# Altium PCB PCB1.PcbDoc
Units mil, origin at the board's own origin, x right, y up, seen from the top; angles counter-clockwise.
Board outline 6000 x 4000 mil, 2 copper layers (Top Layer, Bottom Layer); 13 components, 24 nets, 296 pads, 56 vias.
Unrouted connection lines stored in the file: 14.
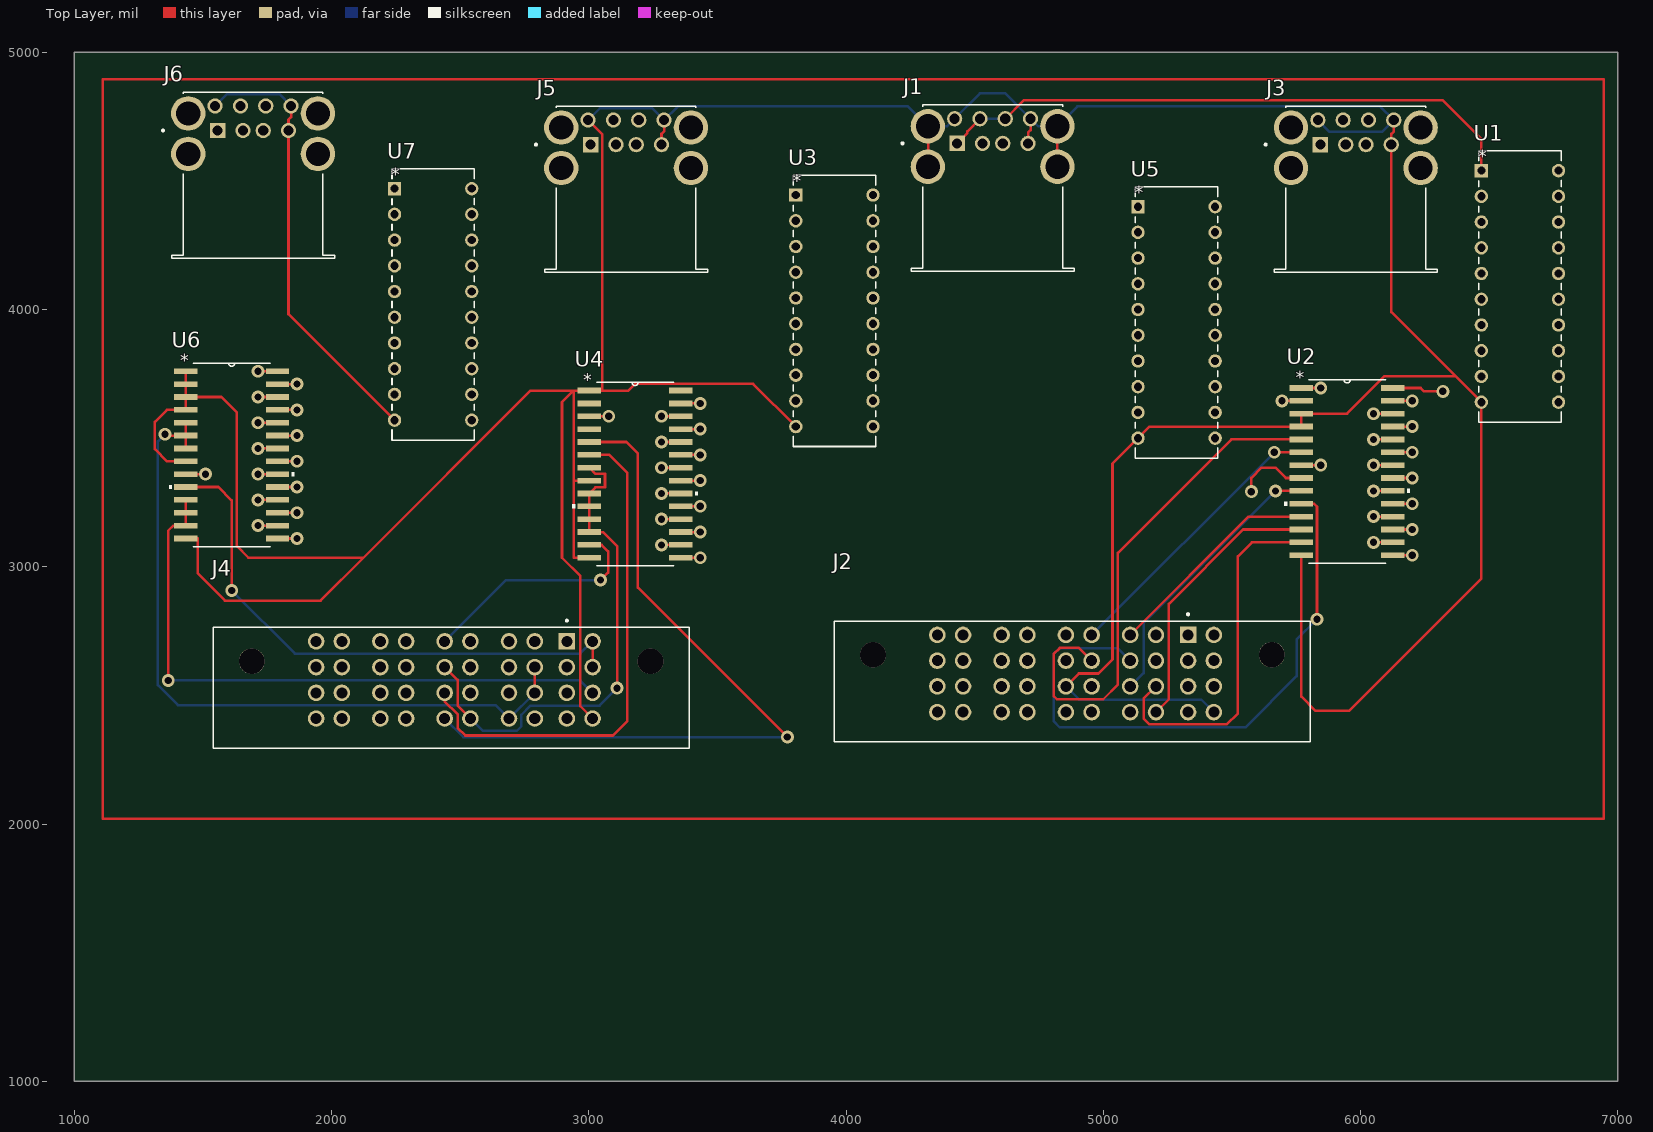
[diagram p0: Top Layer view]
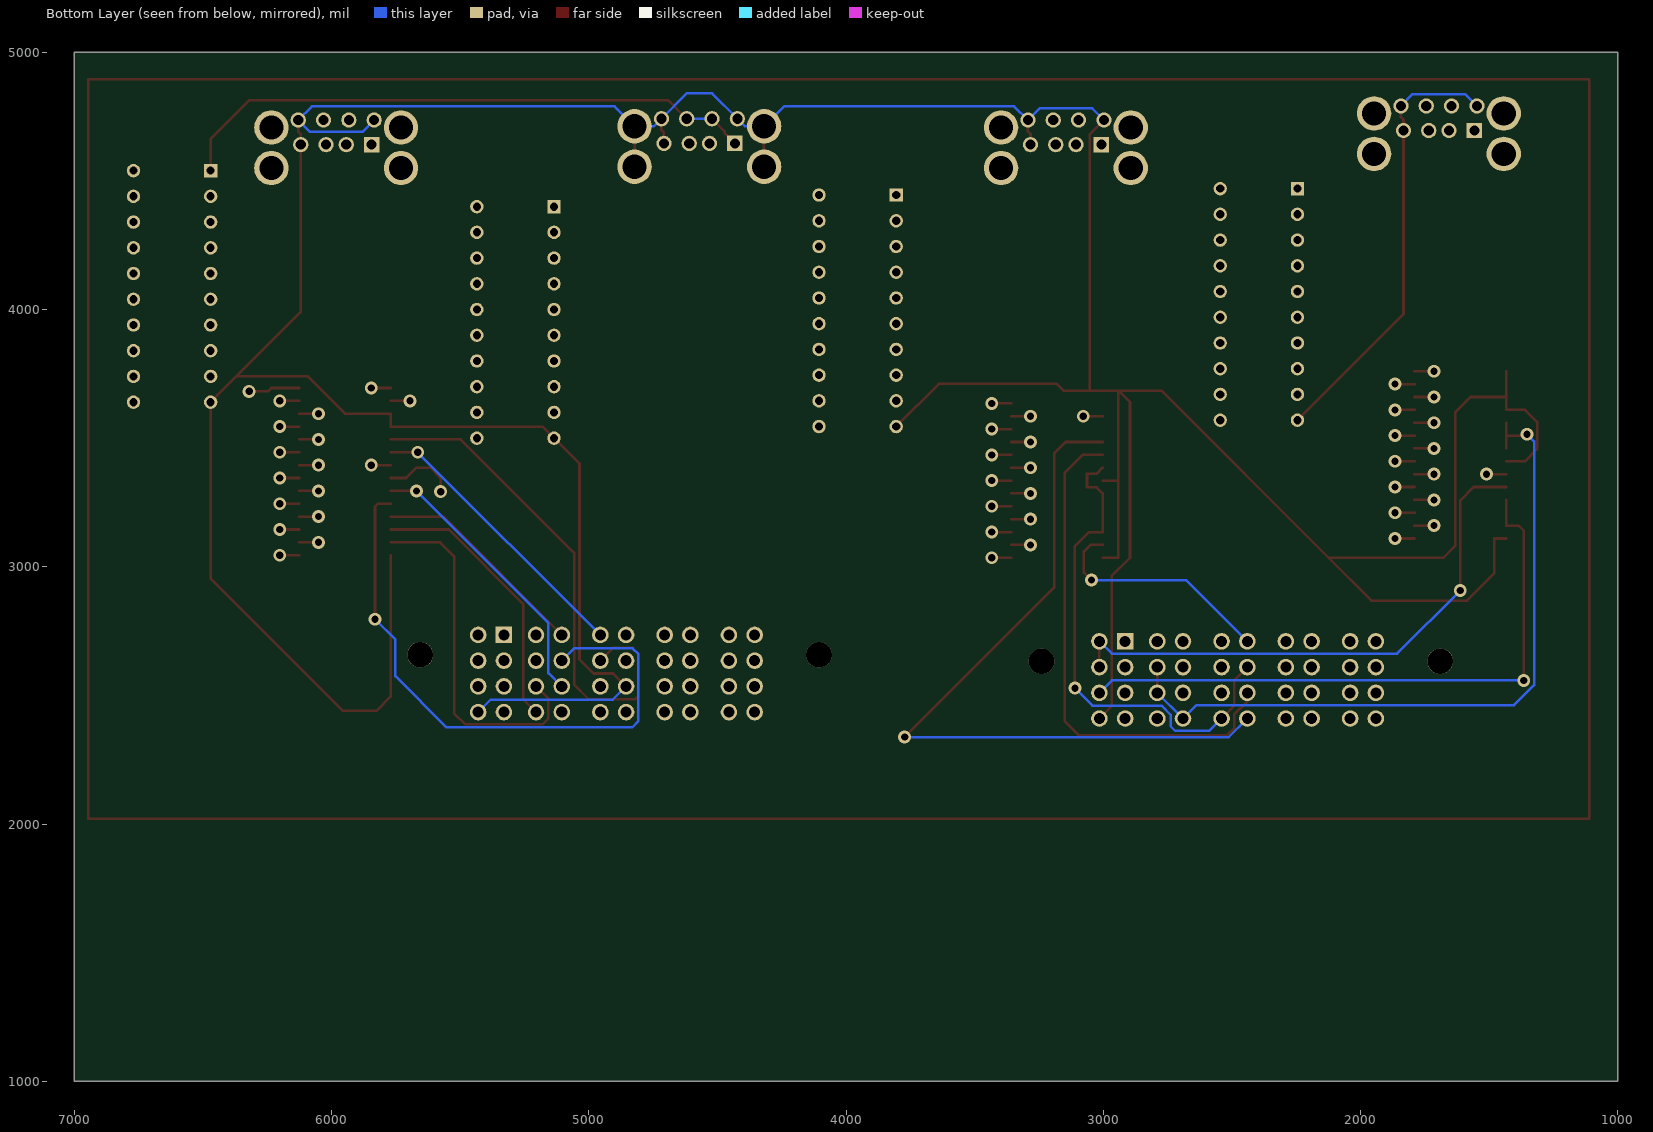
[diagram p1: Bottom Layer view, seen from below]
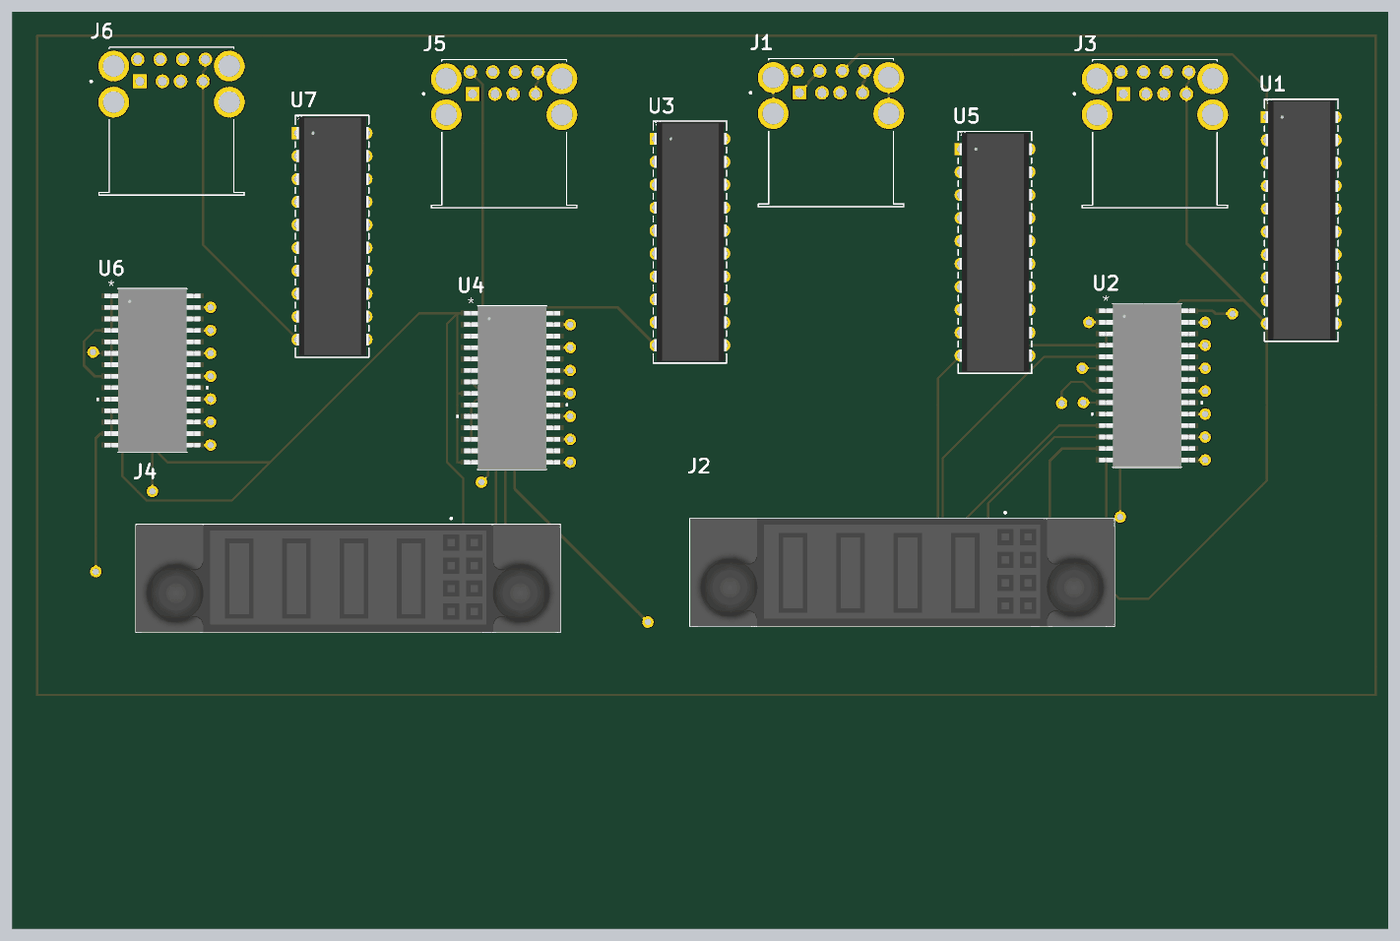
[diagram p2: 3D render of the assembled board from above, using the file's embedded part models]

## Layer stack, top to bottom
Top Solder: solder mask 0.4, Solder Resist, Dk 3.5
Top Layer: signal copper 1.4
Dielectric 1: dielectric 12.6, FR-4, Dk 4.8
Bottom Layer: signal copper 1.4
Bottom Solder: solder mask 0.4, Solder Resist, Dk 3.5

## Board outline
1000,1000 7000,1000 7000,5000 1000,5000

## Design rules (kind name [scope] priority, off if disabled: settings)
Clearance [All] p1: gap=10 ignorepadtopadclearanceinfootprint=FALSE except(0: Arc-Hole Track-Hole SMDPad-Hole THPad-Hole Via-Hole Fill-Hole Poly-Hole Region-Hole Text-Hole)
PolygonConnect [All] p1: connectstyle=Relief reliefconductorwidth=10 reliefentries=4 polygonreliefangle="90 Angle" airgapwidth=10
RoutingVias [All] p1: holewidth=28 width=50 viastyle="Through Hole" minholewidth=28 minwidth=50 maxholewidth=28 maxwidth=50
SolderMaskExpansion [All] p1: expansion=4 istentingtop=FALSE
Width [All] p1: maxlimit=10 minlimit=10 preferedwidth=10
30 further rules are at their usual default settings.

## Classes and differential pairs
component class Sheet1: J1 J2 J3 J4 J5 U1 U2 U3 U4 U5 U6 U7

## Components (designator, comment, footprint, x,y, rotation, side; value= is the part's Value field where it differs from the comment)
J1 "55917-001LF" AMPHENOL_55917-001LF 4570,4555 r0 top
J2 "51742-10400800AALF" AMPHENOL_51742-10400800AALF 4880,2657.83 r180 top
J3 "55917-001LF" AMPHENOL_55917-001LF 5981.97,4550 r0 top
J4 "51742-10400800AALF" AMPHENOL_51742-10400800AALF 2465,2632.83 r180 top
J5 "55917-001LF" AMPHENOL_55917-001LF 3145,4550 r0 top
J6 "55917-001LF" AMPHENOL_55917-001LF 1695,4605 r0 top
U1 "ADC0820CCN+" 21-0043D_20_MXM 6470,4540 r0 top
U2 "ADS7824U/1K" DW28 5948,3370 r0 top
U3 "ADC0820CCN+" 21-0043D_20_MXM 3805,4445 r0 top
U4 "ADS7824U/1K" DW28 3180,3360 r0 top
U5 "ADC0820CCN+" 21-0043D_20_MXM 5135,4400 r0 top
U6 "ADS7824U/1K" DW28 1612,3435 r0 top
U7 "ADC0820CCN+" 21-0043D_20_MXM 2245,4470 r0 top

## Footprints (in the part's own frame and the unit in brackets; to place one, negate y for a bottom-side part, rotate by r counter-clockwise, add the part's x,y. Pads: shape width x height; smd on the part's side, far side on the other; paste and mask are expansions set on the pad)
21-0043D_20_MXM [mil]
  rect 52x52 / inner round 60 / far side rect 52x52 hole 32 paste-26 mask+0: 1(0,0)
  round 52 / inner round 60 / far side round 52 hole 32 paste-26 mask+0: 2(0,-100) 3(0,-200) 4(0,-300) 5(0,-400) 6(0,-500) 7(0,-600) 8(0,-700) 9(0,-800) 10(0,-900) 11(300,-900) 12(300,-800) 13(300,-700) 14(300,-600) 15(300,-500) 16(300,-400) 17(300,-300) 18(300,-200) 19(300,-100) 20(300,0)
  silkscreen extent -10,-978 310,78, body extent -5,-973 310,73, height 185
AMPHENOL_51742-10400800AALF [mm]
  rect 1.635x1.635 / inner round 1.635 / far side rect 1.635x1.635 hole 1.09: A1(-11.425,-1.96)
  round 1.635 hole 1.09: A2(-13.965,-1.96) B1(-11.425,0.58) B2(-13.965,0.58) C1(-11.425,3.12) C2(-13.965,3.12) D1(-11.425,5.66) D2(-13.965,5.66) P1_1(13.335,5.66) P1_2(13.335,3.12) P1_3(13.335,0.58) P1_4(13.335,-1.96) P1_5(10.795,5.66) P1_6(10.795,3.12) P1_7(10.795,0.58) P1_8(10.795,-1.96) P2_1(6.985,5.66) P2_2(6.985,3.12) P2_3(6.985,0.58) P2_4(6.985,-1.96) P2_5(4.445,5.66) P2_6(4.445,3.12) P2_7(4.445,0.58) P2_8(4.445,-1.96) P3_1(0.635,5.66) P3_2(0.635,3.12) P3_3(0.635,0.58) P3_4(0.635,-1.96) P3_5(-1.905,5.66) P3_6(-1.905,3.12) P3_7(-1.905,0.58) P3_8(-1.905,-1.96) P4_1(-5.715,5.66) P4_2(-5.715,3.12) P4_3(-5.715,0.58) P4_4(-5.715,-1.96) P4_5(-8.255,5.66) P4_6(-8.255,3.12) P4_7(-8.255,0.58) P4_8(-8.255,-1.96)
  round 2.54 hole 2.54 unplated: ""(-19.685,0) ""(19.685,0)
  silkscreen extent -23.49,-4.1 23.49,8.61, body extent -23.49,-3.3 23.49,8.64, height 17.02
AMPHENOL_55917-001LF [mm]
  rect 1.508x1.508 hole 1: 1(-3.5,2.31)
  round 1.508 hole 1: 2(-1,2.31) 3(1,2.31) 4(3.5,2.31) 5(-3.75,4.74) 6(-1.25,4.74) 7(1.25,4.74) 8(3.75,4.74)
  round 3.396 hole 2.38: SH1(-6.4,0) SH2(-6.4,4) SH3(6.4,0) SH4(6.4,4)
  silkscreen extent -9,-10.3 8.05,6.1
DW28 [mil]
  rect 91x22 smd paste-45.5 mask-45.5: 1(-178,325) 2(-178,275) 3(-178,225) 4(-178,175) 5(-178,125) 6(-178,75) 7(-178,25) 8(-178,-25) 9(-178,-75) 10(-178,-125) 11(-178,-175) 12(-178,-225) 13(-178,-275) 14(-178,-325) 15(178,-325) 16(178,-275) 17(178,-225) 18(178,-175) 19(178,-125) 20(178,-75) 21(178,-25) 22(178,25) 23(178,75) 24(178,125) 25(178,175) 26(178,225) 27(178,275) 28(178,325)
  silkscreen extent -244,-356 244,356, body extent -209,-356 209,356, height 104

## Part data
J1 J3 J5 J6: Package=None, Availability=Unavailable, MP=55917-001LF, Price=None
J2 J4: "PwrBladeÂ®, Power Supply Connectors, 4P 8S Vertical Receptacle.", Package=None, Availability="In Stock", Check_prices=https://www.snapeda.com/parts/51742-10400800AALF/Amphenol+FCI/view-part/?ref=eda, MF="Amphenol ICC (FCI)", MP=51742-10400800AALF, Price=None, Purchase-URL=https://pricing.snapeda.com/search?q=51742-10400800AALF&ref=eda, SnapEDA_Link=https://www.snapeda.com/parts/51742-10400800AALF/Amphenol+FCI/view-part/?ref=snap
U1 U3 U5 U7: "No Description Available", Mfr_Name="Analog Devices Inc", Copyright="Copyright (C) 2023 Ultra Librarian. All rights reserved.", Manufacturer_Part_Number=ADC0820CCN+, RefDes=RefDes, Type=DEV
U2 U4 U6: library part ADS7824U1K, "No Description Available", Mfr_Name="Texas Instruments", Copyright="Copyright (C) 2023 Ultra Librarian. All rights reserved.", Manufacturer_Part_Number=ADS7824U/1K, RefDes=RefDes, Type=DEV

## Via types
v1: diameter 50, hole 28, Top Layer to Bottom Layer, 56 vias

## Nets (pads, with @x,y where several pads share a name; then routed paths per layer and width w, separated by ;. In a path a pad name is that pad's centre, name@x,y a point inside that pad or via, vN(x,y) a via of type N, cw(c..) or ccw(c..) an arc to the next point about the centre after c; other vN are vias at no path point)
GND: J1.4 J1.5 J1.8 J1.SH1 J1.SH2 J1.SH3 J1.SH4 J2.D2 J2.P3_2 J3.4 J3.5 J3.8 J4.D2 J5.4 J5.5 J5.8 U1.10 U2.3 U2.4 U2.14 U3.10 U4.1 U4.8 U4.14 U5.10 U6.1 U6.2 U6.3 U6.4 U6.8 U6.14 | length 18702.3
  Top Layer w10: U6.14 1480,3110 1480,2974 1586,2868 1957,2868 2124,3035 ; U6.8 1360,3410 1313,3457 1313,3563 1360,3610 U6.4 U6.3 ; U6.1 U6.2 U6.3 ; J5.5 3052,4681.98 3052,3685 ; U4.14 2941,3035 2941,3335 ; U4.8 2941,3335 ; J4.D2 2967,2457.8 2967,2964 2896,3035 2896,3640 2941,3685 ; J5.4 3282.8,4683 3292.64,4692.84 J5.8 ; U3.10 3639,3711 3180,3711 3154,3685 3052,3685 ; J1.SH1 4319,4555.97 4319,4711.51 J1.SH2 ; J1.4 4707.8,4688 4717.64,4697.84 J1.8 ; J1.SH3 J1.SH4 ; J2.P3_2 4905,2585 4981,2585 5036,2640 5036,3401 U5.10 5180,3545 U2.4 U2.3 5948,3595 6094,3741 6369,3741 ; U2.14 5770,2495 5825,2440 5955,2440 6470,2955 U1.10 6369,3741 ; J3.8 6129.61,4692.84 6119.76,4683 J3.4 6119.76,3990.24 6369,3741 ; U6.3 1572,3660 1632,3600 1632,3080 1677,3035 2124,3035 ; 2124,3035 2774,3685 2941,3685 ; 2941,3335 2941,3685 ; 2941,3685 U4.1 3052,3685
  Bottom Layer w10: J5.5 3042.75,4782 3247.25,4782 J5.8 3346.02,4790 4240.51,4790 J1.SH2 4393.23,4712.48 J1.5 4520.75,4840 4619.25,4840 J1.8 4746.77,4712.48 J1.SH4 4899.49,4790 6076.22,4790 J3.8 6083.99,4691 5879.94,4691 J3.5 ; J2.P3_2 4907,2483 5381.8,2483 J2.D2
NetJ1_1: J1.1 J1.6 J1.7 U1.1 | length 2296.3
  Top Layer w10: J1.1 4472,4685.74 4472,4692.83 J1.6 ; J1.7 4690.6,4813 6320,4813 6470,4663 U1.1
  Bottom Layer w10: J1.6 J1.7
NetJ2_A2: J2.A2 U2.2 | length 75.5
  Top Layer w10: v1(5694.5,3645) U2.2
NetJ2_C2: J2.C2 U4.2 U4.3 U4.4 | length 75.5
  Top Layer w10: U4.3 v1(3077.5,3585)
NetJ2_P3_1: J2.P3_1 J2.P3_3 U2.1 | length 75.5
  Top Layer w10: U2.1 v1(5845.5,3695)
NetJ2_P3_7: J2.P3_7 U2.5 | length 2027.7
  Top Layer w10: J2.P3_7 4905,2685 4832,2685 4807,2660 4807,2498 4820,2485 5000,2485 5057,2542 5057,3054 5498,3495 U2.5
NetJ2_P3_8: J2.P3_8 U2.6 | length 1109.1
  Top Layer w10: v1(5665,3445) U2.6
  Bottom Layer w10: J2.P3_8 v1(5665,3445)
NetJ2_P4_1: J2.P4_1 U2.8 | length 280.4
  Top Layer w10: v1(5575.79,3292) 5575.79,3345 5615.79,3385 5670.36,3385 5710.36,3345 U2.8
NetJ2_P4_2: J2.P4_2 U2.9 | length 1094
  Top Layer w10: v1(5670,3295) U2.9
  Bottom Layer w10: J2.P4_2 5157,2587 5157,2782 v1(5670,3295)
NetJ2_P4_3: J2.P4_3 U2.10 | length 2382.1
  Top Layer w10: U2.10 5820,3245 5831,3234 v1(5831,2796)
  Bottom Layer w10: J2.P4_3 5057,2683 4830,2683 4807,2660 4807,2400 4831,2376 5553,2376 5752,2575 5752,2717 v1(5831,2796)
NetJ2_P4_4: J2.P4_4 U2.11 | length 855.5
  Top Layer w10: J2.P4_4 5565,3195 U2.11
NetJ2_P4_5: J2.P4_5 U2.12 | length 1076.4
  Top Layer w10: J2.P4_5 5255,2485 5255,2856 5544,3145 U2.12
NetJ2_P4_6: J2.P4_6 U2.13 | length 1418
  Top Layer w10: J2.P4_6 5157,2487 5157,2410 5180,2387 5480,2387 5523,2430 5523,3040 5578,3095 U2.13
NetJ3_1: J3.1 U3.1
NetJ4_A2: J4.A2 J4.B2 U6.10 | length 2174.1
  Top Layer w10: U6.10 1560,3310 1612,3258 v1(1612,2908) ; J4.B2 J4.A2
  Bottom Layer w10: v1(1612,2908) 1858,2662 2966.8,2662 J4.A2
NetJ4_C2: J4.C2 U6.11 U6.12 U6.13 | length 2429
  Top Layer w10: v1(1365,2558) 1365,3140 1385,3160 U6.13 U6.12 U6.11
  Bottom Layer w10: v1(1365,2558) 2966.8,2558 J4.C2
NetJ4_P3_1: J4.P3_1 U4.5 | length 2912.1
  Top Layer w10: U4.5 3146,3485 3191,3440 3191,2919 v1(3772,2338)
  Bottom Layer w10: J4.P3_1 2512,2338 v1(3772,2338)
NetJ4_P3_2: J4.P3_2 U4.6 | length 1994.3
  Top Layer w10: J4.P3_2 2440,2476.73 2490,2426.73 2490,2374 2520,2344 3094,2344 3150,2400 3150,3365 3080,3435 U4.6
NetJ4_P3_3: J4.P3_3 J4.P3_5 U4.7 U4.9 U4.10 U4.11 U4.12 | length 1952.9
  Top Layer w10: J4.P3_3 2490,2560 2490,2460 J4.P3_5 ; U4.7 3026,3361 3063,3361 3063,3309 3026,3309 U4.9 U4.10 U4.11 U4.12 3055,3135 3110,3080 v1(3110,2528)
  Bottom Layer w10: J4.P3_5 2588,2362 2720,2362 2738,2380 2738,2424.73 2773.27,2460 3042,2460 v1(3110,2528)
NetJ4_P3_4: J4.P3_4 U4.13 | length 912
  Top Layer w10: U4.13 3050,3085 3075,3060 3075,2977 v1(3046,2948)
  Bottom Layer w10: J4.P3_4 2678,2948 v1(3046,2948)
NetJ4_P4_1: J4.P4_1 J4.P4_6 J4.P4_7 U6.5 U6.6 U6.7 | length 2829.9
  Top Layer w10: v1(1353,3515) 1358,3510 U6.6 ; U6.7 U6.6 ; U6.5 U6.6 ; J4.P4_6 J4.P4_7
  Bottom Layer w10: v1(1353,3515) 1325,3487 1325,2540 1403,2462 2638,2462 J4.P4_1 J4.P4_6
NetJ5_1: J5.1 J5.6 J5.7 U5.1
NetJ6_1: J6.1 J6.6 J6.7 U7.1
NetJ6_4: J6.4 J6.5 J6.8 U7.10 | length 1729.3
  Top Layer w10: J6.8 1842.64,4747.84 1832.8,4738 J6.4 1832.8,3982.2 U7.10
  Bottom Layer w10: J6.5 1592.75,4837 1797.25,4837 J6.8
pads on no net: J1.2 J1.3 J2. J2.A1 J2.B1 J2.B2 J2.C1 J2.D1 J2.P1_1 J2.P1_2 J2.P1_3 J2.P1_4 J2.P1_5 J2.P1_6 J2.P1_7 J2.P1_8 J2.P2_1 J2.P2_2 J2.P2_3 J2.P2_4 J2.P2_5 J2.P2_6 J2.P2_7 J2.P2_8 J2.P3_4 J2.P3_5 J2.P3_6 J2.P4_7 J2.P4_8 J3.2 J3.3 J3.6 J3.7 J3.SH1 J3.SH2 J3.SH3 J3.SH4 J4. J4.A1 J4.B1 J4.C1 J4.D1 J4.P1_1 J4.P1_2 J4.P1_3 J4.P1_4 J4.P1_5 J4.P1_6 J4.P1_7 J4.P1_8 J4.P2_1 J4.P2_2 J4.P2_3 J4.P2_4 J4.P2_5 J4.P2_6 J4.P2_7 J4.P2_8 J4.P3_6 J4.P3_7 J4.P3_8 J4.P4_2 J4.P4_3 J4.P4_4 J4.P4_5 J4.P4_8 J5.2 J5.3 J5.SH1 J5.SH2 J5.SH3 J5.SH4 J6.2 J6.3 J6.SH1 J6.SH2 J6.SH3 J6.SH4 U1.2 U1.3 U1.4 U1.5 U1.6 U1.7 U1.8 U1.9 U1.11 U1.12 U1.13 U1.14 U1.15 U1.16 U1.17 U1.18 U1.19 U1.20 U2.7 U2.15 U2.16 U2.17 U2.18 U2.19 U2.20 U2.21 U2.22 U2.23 U2.24 U2.25 U2.26 U2.27 U2.28 U3.2 U3.3 U3.4 U3.5 U3.6 U3.7 U3.8 U3.9 U3.11 U3.12 U3.13 U3.14 U3.15 U3.16 U3.17 U3.18 U3.19 U3.20 U4.15 U4.16 U4.17 U4.18 U4.19 U4.20 U4.21 U4.22 U4.23 U4.24 U4.25 U4.26 U4.27 U4.28 U5.2 U5.3 U5.4 U5.5 U5.6 U5.7 U5.8 U5.9 U5.11 U5.12 U5.13 U5.14 U5.15 U5.16 U5.17 U5.18 U5.19 U5.20 U6.9 U6.15 U6.16 U6.17 U6.18 U6.19 U6.20 U6.21 U6.22 U6.23 U6.24 U6.25 U6.26 U6.27 U6.28 U7.2 U7.3 U7.4 U7.5 U7.6 U7.7 U7.8 U7.9 U7.11 U7.12 U7.13 U7.14 U7.15 U7.16 U7.17 U7.18 U7.19 U7.20
copper on no net: | length 20790.6
  Top Layer w10: 1434,3360 v1(1509.5,3360) ; v1(1714.5,3160) 1790,3160 ; v1(1714.5,3260) 1790,3260 ; v1(1714.5,3360) 1790,3360 ; v1(1714.5,3460) 1790,3460 ; v1(1714.5,3560) 1790,3560 ; v1(1714.5,3660) 1790,3660 ; v1(1714.5,3760) 1790,3760 ; 1790,3110 v1(1865.5,3110) ; 1790,3210 v1(1865.5,3210) ; 1790,3310 v1(1865.5,3310) ; 1790,3410 v1(1865.5,3410) ; 1790,3510 v1(1865.5,3510) ; 1790,3610 v1(1865.5,3610) ; 1790,3710 v1(1865.5,3710) ; v1(3282.5,3085) 3358,3085 ; v1(3282.5,3185) 3358,3185 ; v1(3282.5,3285) 3358,3285 ; v1(3282.5,3385) 3358,3385 ; v1(3282.5,3485) 3358,3485 ; v1(3282.5,3585) 3358,3585 ; 3358,3035 v1(3433.5,3035) ; 3358,3135 v1(3433.5,3135) ; 3358,3235 v1(3433.5,3235) ; 3358,3335 v1(3433.5,3335) ; 3358,3435 v1(3433.5,3435) ; 3358,3535 v1(3433.5,3535) ; 3358,3635 v1(3433.5,3635) ; 5770,3395 v1(5845.5,3395) ; v1(6050.5,3095) 6126,3095 ; v1(6050.5,3195) 6126,3195 ; v1(6050.5,3295) 6126,3295 ; v1(6050.5,3395) 6126,3395 ; v1(6050.5,3495) 6126,3495 ; v1(6050.5,3595) 6126,3595 ; 6126,3045 v1(6201.5,3045) ; 6126,3145 v1(6201.5,3145) ; 6126,3245 v1(6201.5,3245) ; 6126,3345 v1(6201.5,3345) ; 6126,3445 v1(6201.5,3445) ; 6126,3545 v1(6201.5,3545) ; 6126,3645 v1(6201.5,3645) ; 6126,3695 6233.93,3695 6246.93,3682 v1(6320.21,3682) ; 1110,2020 6945,2020 6945,4895 1110,4895 1110,2020

## Text inside footprints (layer, text, board x,y; h text height)
U1: Top Overlay "*" at 6457.5,4571 h50; Mechanical 13 "*" at 6462.5,4515 h50
U2: Top Overlay "*" at 5747.5,3712 h50; Mechanical 13 "*" at 5747.5,3712 h50
U3: Top Overlay "*" at 3792.5,4476 h50; Mechanical 13 "*" at 3797.5,4420 h50
U4: Top Overlay "*" at 2979.5,3702 h50; Mechanical 13 "*" at 2979.5,3702 h50
U5: Top Overlay "*" at 5122.5,4431 h50; Mechanical 13 "*" at 5127.5,4375 h50
U6: Top Overlay "*" at 1411.5,3777 h50; Mechanical 13 "*" at 1411.5,3777 h50
U7: Top Overlay "*" at 2232.5,4501 h50; Mechanical 13 "*" at 2237.5,4445 h50